# Altium PCB JGEJ_V1.3.PcbDoc
Units mm, origin at the board's own origin, x right, y up, seen from the top; angles counter-clockwise.
Board outline 7.72 x 47.12 mm, 4 copper layers (Top, INNER LAYER2, INNER LAYER3, Bottom), stack 0.774 mm thick; 138 components, 82 nets, 365 pads, 38 vias.
Unrouted connection lines stored in the file: 233.
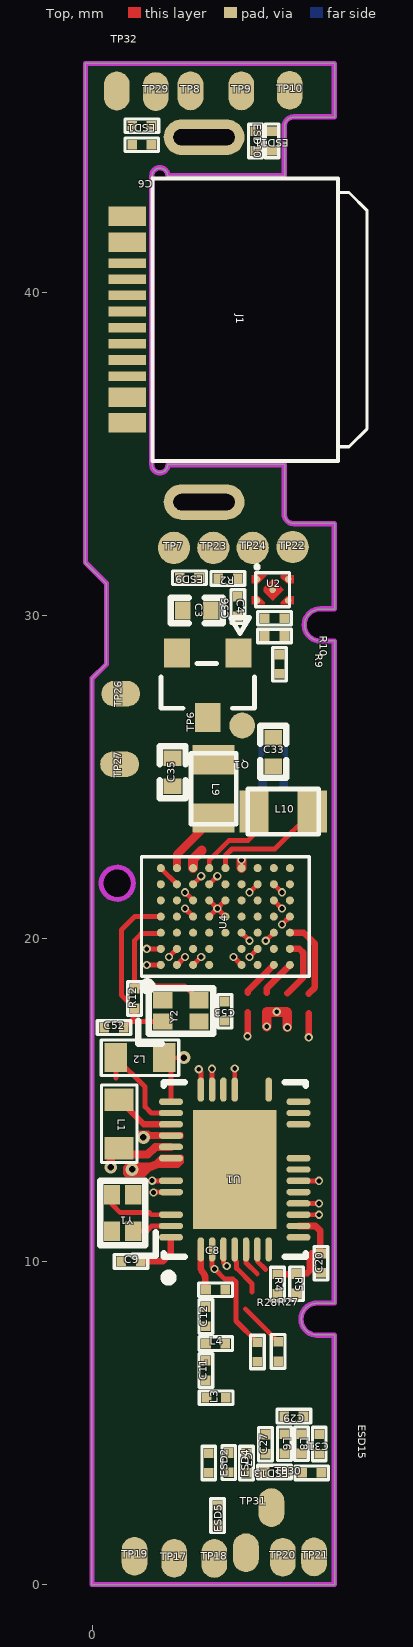
[diagram p0: Top view]
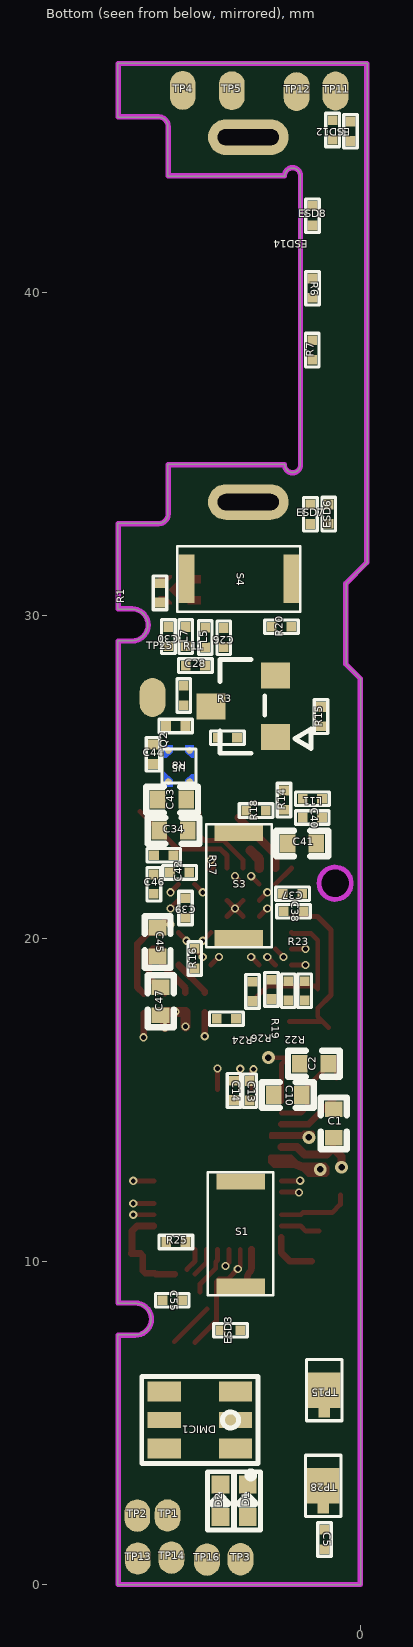
[diagram p1: Bottom view, seen from below]
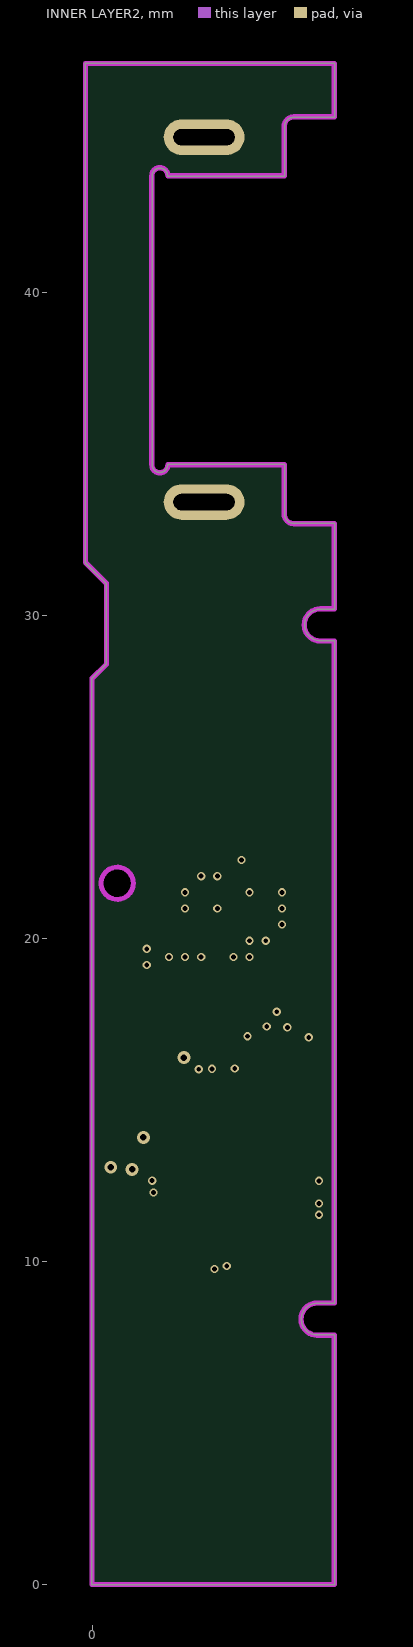
[diagram p2: INNER LAYER2]

## Layer stack, top to bottom
Solder Mask Top: solder mask 0.0102, Solder Resist, Dk 3.5
Top: signal copper 0.0343
Dielectric1: core 0.254, FR-4, Dk 4.2
INNER LAYER2: signal copper 0.0343
Dielectric2: prepreg 0.127, FR-4, Dk 4.2
INNER LAYER3: signal copper 0.036
Dielectric 3: core 0.254, Dk 4.2
Bottom: signal copper 0.0343
Solder Mask Bottom: solder mask 0.0102, Solder Resist, Dk 3.5

## Board outline
-0.011,0 ccw(c0,0) 0,-0.011 7.5,-0.011 ccw(c7.5,0) 7.511,0 7.511,7.715 cw(c7.5,7.715) 7.511,7.715 cw(c7.5,7.715) 7.511,7.715 ccw(c7.505,7.715) 7.511,7.715 ccw(c7.5,7.715) 7.5,7.726 6.97,7.726 ccw(c6.97,7.715) 6.97,7.726 cw(c6.97,7.72) 6.97,7.726 ccw(c6.97,7.72) 6.969,7.726 cw(c6.969,7.72) 6.969,7.726 cw(c6.969,7.72) 6.97,7.726 cw(c6.97,8.215) 6.97,7.726 ccw(c6.97,7.715) 6.969,7.726 ccw(c6.97,7.715) 6.969,7.726 cw(c6.97,8.215) 6.97,8.704 ccw(c6.97,8.715) 6.971,8.704 ccw(c6.97,8.715) 6.971,8.704 7.5,8.704 ccw(c7.5,8.715) 7.511,8.715 7.511,29.215 ccw(c7.5,29.215) 7.5,29.226 7.07,29.226 cw(c7.07,29.22) 7.07,29.226 cw(c7.07,29.715) 7.07,30.204 ccw(c7.07,30.21) 7.07,30.204 cw(c7.07,29.715) 7.07,30.204 7.5,30.204 ccw(c7.5,30.215) 7.511,30.215 7.511,32.85 ccw(c7.5,32.85) 7.5,32.861 6.269,32.861 ccw(c6.269,32.85) 6.259,32.855 ccw(c6.25,32.85) 6.25,32.861 cw(c6.25,33.15) 5.961,33.149 ccw(c5.95,33.15) 5.961,33.15 5.961,34.674 ccw(c5.95,34.675) 5.961,34.675 ccw(c5.95,34.675) 5.95,34.686 2.35,34.686 ccw(c2.35,34.68) 2.349,34.686 cw(c2.35,34.675) 2.35,34.686 cw(c2.35,34.68) 2.35,34.686 ccw(c2.35,34.675) 2.35,34.686 cw(c2.35,34.675) 2.35,34.686 cw(c2.35,34.675) 2.35,34.686 2.349,34.686 ccw(c2.35,34.675) 2.347,34.685 ccw(c2.35,34.675) 2.339,34.675 ccw(c2.35,34.675) 2.339,34.675 ccw(c2.35,34.675) 2.339,34.674 ccw(c2.1,34.675) 2.339,34.675 ccw(c2.1,34.675) 2.339,34.675 ccw(c2.1,34.675) 2.339,34.675 cw(c2.345,34.675) 2.339,34.675 cw(c2.345,34.675) 2.339,34.675 2.339,34.674 ccw(c2.35,34.675) 2.339,34.674 cw(c2.1,34.675) 1.861,34.675 ccw(c1.85,34.675) 1.861,34.675 1.861,43.625 ccw(c1.85,43.625) 1.861,43.625 cw(c2.1,43.625) 2.339,43.626 cw(c2.35,43.625) 2.339,43.626 ccw(c2.35,43.625) 2.35,43.614 5.95,43.614 ccw(c5.95,43.625) 5.961,43.625 5.961,45.15 ccw(c5.955,45.15) 5.961,45.15 cw(c6.25,45.15) 5.961,45.151 cw(c6.25,45.15) 6.25,45.439 cw(c6.25,45.15) 6.25,45.439 cw(c6.25,45.15) 6.25,45.439 7.5,45.439 ccw(c7.5,45.45) 7.511,45.45 7.511,47.1 ccw(c7.5,47.1) 7.5,47.111 -0.2,47.111 ccw(c-0.2,47.1) -0.211,47.1 -0.211,31.65 ccw(c-0.2,31.65) -0.208,31.642 0.439,30.996 0.439,28.504 -0.007,28.058 cw(c0,28.05) -0.007,28.058 ccw(c0,28.05) -0.007,28.058 ccw(c0,28.05) -0.008,28.058 ccw(c0,28.05) -0.011,28.05
cut-out: 0.28,21.715 ccw(c0.78,21.715) 0.78,21.215 ccw(c0.78,21.715) 1.28,21.715 ccw(c0.78,21.715) 0.78,22.215 ccw(c0.78,21.715)

## Design rules (kind name [scope] priority, off if disabled: settings)
Clearance [All] p1: gap=0.102
ComponentClearance "ComponentClearance - Default - DEFAULT" [All] p1 off: gap=0.152 collisioncheckmode=3 verticalgap=0.254 showdistances=FALSE
HoleSize [All] p1: absolutevalues=TRUE maxlimit=12.7 minlimit=0.025 maxpercent=80.000 minpercent=20.000
HoleToHoleClearance "HoleToHoleClearance - Default - DEFAULT" [All] p1: gap=0.152 allowstackedmicrovias=TRUE
Length "Default Length" [All] p1: maxlimit=1270 minlimit=0
MaxMinImpedance "Default Impedance" [All] p1: minimum=50.00 maximum=150.0
ParallelSegment "Default Parallel Segment Same Layer" [All] p1: limit=25.4 gap=5.08
ParallelSegment "Default Parallel Segment Adjasent" [All] p2: limit=25.4 gap=5.08
PlaneConnect "Default PlaneConnect" [All] p1: planeconnectstyle=Relief reliefexpansion=0.508 reliefentries=4 reliefconductorwidth=0.381 reliefairgap=0.254
PolygonConnect "PolygonConnect - Default SMT" [IsVIA] p1: connectstyle=Direct reliefconductorwidth=0.254 reliefentries=4 polygonreliefangle="90 Angle" airgapwidth=0.254
PolygonConnect "PolygonConnect - Default Pad" [All] p2: connectstyle=Relief reliefconductorwidth=0.381 reliefentries=4 polygonreliefangle="90 Angle" airgapwidth=0.254
RoutingLayers "RoutingLayers - Default - DEFAULT" [All] p1: top layer_v5=TRUE mid layer 1_v5=FALSE mid layer 2_v5=TRUE bottom layer_v5=TRUE
RoutingPriority "RoutingPriority - Default - DEFAULT" [All] p1: routingpriority=3
RoutingTopology "Default Routing Topology" [All] p1: topology=Shortest
RoutingVias "RoutingVias - Default - DEFAULT" [All] p1: holewidth=0.102 width=0.508 viastyle="Through Hole" minholewidth=0.102 minwidth=0.102 maxholewidth=2.54 maxwidth=2.54
SMDToCorner "SMDToCorner - Default - DEFAULT" [All] p1: distance=20000
SilkToSilkClearance [All] p1 off: silktosilkclearance=0.102
SilkToSolderMaskClearance [IsPad] p1: minsilkscreentomaskgap=0.102 clearancetoexposedcopper=TRUE
SolderMaskExpansion "SolderMaskExpansion from CAM settings" [All] p1: expansion=0.051
UnpouredPolygon [All] p1: allowunpoured=FALSE
Width "Default Width" [All] p1: maxlimit=1.524 minlimit=0.076 preferedwidth=0.152 toplayer_minwidth=0.102 midlayer1_minwidth=0.102 bottomlayer_minwidth=0.102 minimp=50.000000 maximp=50.000000 favimp=50.000000
20 further rules are at their usual default settings.

## Classes and differential pairs
component class "BT ": + C1 C2 C3 C4 C5 C8 C9 C10 C11 C12 C13 C14 C20 C26 C27 C28 C29 C30 C31 D1 D2 ESD3 ESD6 ESD7 ESD8 ESD9 GND J1 L1 L2 L3 L4 L5 L6 L7 L8 R2 R4 R5 R6 R7 R8 R25 S1 TP1 TP2 TP3 TP4 TP5 TP15 TP28 U1 U2 Y1
component class SNC8600A: C6 C7 C33 C34 C35 C36 C37 C38 C39 C40 C41 C42 C43 C44 C45 C46 C47 C52 C53 C55 DMIC1 ESD1 ESD2 ESD4 ESD5 ESD10 ESD11 ESD12 ESD13 ESD14 ESD15 L9 L10 L11 Q1 Q2 R1 R3 R9 R10 R11 R12 R14 R15 R16 R17 R18 R19 R20 R22 R23 R24 R26 R27 R28 S3 S4 TP6 TP7 TP8 TP9 TP10 TP11 TP12 TP13 TP14 TP16 TP17 TP18 TP19 TP20 TP21 TP22 TP23 TP24 TP25 TP26 TP27 TP29 TP30 TP31 TP32 U4 U5 Y2

## Components (designator, comment, footprint, x,y, rotation, side; value= is the part's Value field where it differs from the comment)
C1 "2.2uF/10V" C0402 0.823,14.28 r90 bottom
C2 "2.2uF/10V" C0402 1.44,16.126 r180 bottom
C3 "4.7uF/10V" C0402 3.243,30.162 r180 top
C4 "100nF/10V" 0201#1 4.516,30.284 r90 top
C5 "2.2pF/50V" 0201#1 1.108,1.394 r270 bottom
C6 "100nF/10V" 0201#1 1.542,44.587 r180 top
C7 "100nF/10V" 0201#1 3.617,3.762 r270 top
C8 "1pF" 0201#1 3.828,9.126 r0 top
C9 "1uF/10V" 0201#1 1.207,10.005 r0 top
C10 "2.2uF/10V" C0402 2.248,15.156 r180 bottom
C11 "0R" 0201#1 3.526,6.624 r270 top
C12 "10pF" 0201#1 3.526,8.293 r270 top
C13 "1uF/10V" 0201#1 3.426,15.288 r270 bottom
C14 "1uF/10V" 0201#1 3.912,15.301 r270 bottom
C20 "100nF/10V" 0201#1 7.092,9.949 r270 top
C26 "120pF/50V" 0201#1 4.232,29.319 r270 bottom
C27 "120pF/50V" 0201#1 5.37,4.344 r90 top
C28 "22pF/50V" 0201#1 5.108,28.456 r180 bottom
C29 "22pF/50V" 0201#1 6.251,5.212 r180 top
C30 "120pF/50V" 0201#1 5.944,29.353 r90 bottom
C31 "120pF/50V" 0201#1 7.038,4.349 r270 top
C33 "4.7uF/10V" C0402 5.616,25.786 r270 top
C34 "4.7uF/10V" C0402 5.781,23.345 r180 bottom
C35 "4.7uF/10V" C0402 2.494,25.153 r270 top
C36 "100nF/10V" 0201#1 5.651,29.924 r180 top
C37 "1uF/10V" 0201#1 2.098,21.392 r0 bottom
C38 "1uF/10V" 0201#1 2.07,20.851 r0 bottom
C39 "1uF/10V" 0201#1 5.415,20.95 r90 bottom
C40 "100nF/10V" 0201#1 1.487,23.75 r0 bottom
C41 "10uF/10V" C0402 1.8,22.946 r0 bottom
C42 "100nF/10V" 0201#1 5.595,22.052 r180 bottom
C43 "22uF/10V" C0402 5.827,24.305 r180 bottom
C44 "100nF/10V" 0201#1 6.421,25.71 r90 bottom
C45 "10uF/10V" C0402 6.279,19.896 r90 bottom
C46 "100nF/10V" 0201#1 6.393,21.687 r270 bottom
C47 "4.7uF/10V" C0402 6.185,18.059 r90 bottom
C52 "12pF/50V" 0201#1 0.681,17.244 r0 top
C53 "12pF/50V" 0201#1 4.115,17.752 r90 top
C55 "100nF/10V" 0201#1 5.824,8.801 r180 bottom
D1 "LED/RED/0402" LED0402 3.487,2.591 r90 bottom locked
D2 "LED/BLUE/0402" LED0402 4.331,2.591 r90 bottom locked
DMIC1 "SDM0502_RFS261_G02-TOP" 3526_TOP 4.969,5.093 r270 bottom locked
ESD1 "ESDAVLC8-1BU2" 0201#1 1.544,45.176 r0 top
ESD2 "ESDAVLC8-1BU2" 0201#1 4.237,3.772 r90 top
ESD3 "ESDAVLC8-1BU2" 0201#1 4.021,7.869 r0 bottom
ESD4 "ESDAVLC8-1BU2" 0201#1 4.785,3.757 r90 top
ESD5 "ESDAVLC8-1BU2" 0201#1 3.887,2.134 r270 top
ESD6 "ESDAVLC8-1BU2" 0201#1 0.975,33.147 r90 bottom
ESD7 "ESDAVLC8-1BU2" 0201#1 1.547,33.142 r90 bottom
ESD8 "ESDAVLC8-1BU2" 0201#1 1.483,42.388 r90 bottom
ESD9 "ESDAVLC8-1BU2" 0201#1 3.015,31.178 r180 top
ESD10 "ESDAVLC8-1BU2" 0201#1 5.06,44.701 r270 top
ESD11 "ESDAVLC8-1BU2" 0201#1 5.575,44.707 r270 top
ESD12 "ESDAVLC8-1BU2" 0201#1 0.859,45.042 r270 bottom
ESD13 "ESDAVLC8-1BU2" 0201#1 5.651,3.48 r180 top
ESD14 "ESDAVLC8-1BU2" 0201#1 0.305,45.004 r270 bottom
ESD15 "ESDAVLC8-1BU2" 0201#1 6.807,3.454 r0 top
J1 "TYPEC" "USB-TYPEC - 12" 1.245,39.171 r90 top
L1 "4.7uH" R0603 0.841,14.264 r90 top
L2 "4.7uH" R0603 1.488,16.312 r0 top
L3 "NC(2.7nH)" 0201#1 3.843,5.779 r0 top
L4 "NC(2.7nH)" 0201#1 3.83,7.457 r0 top
L5 "BLM03HD102SN1D" 0201#1 4.8,29.327 r90 bottom
L6 "BLM03HD102SN1D" 0201#1 5.956,4.354 r270 top
L7 "BLM03HD102SN1D" 0201#1 5.41,29.352 r90 bottom
L8 "BLM03HD102SN1D" 0201#1 6.49,4.354 r270 top
L9 "LQM21PN3R3NG0" L0805 3.764,24.641 r90 top
L10 "LQM21PN3R3NG0" L0805 5.921,23.934 r0 top
L11 "0R" 0201#2 1.686,24.31 r0 bottom
Q1 "SJ2301" SOT23_3407 3.581,27.849 r180 top
Q2 "MMBT3904" SOT23 3.63,27.193 r90 bottom
R1 "0R/5%" 0201#1 6.205,30.709 r90 bottom
R2 "100R/5%" 0201#1 4.209,31.156 r0 top
R3 "10K/5%" 0201#1 4.117,26.22 r180 bottom
R4 "0R/5%" 0201#1 5.74,9.304 r90 top
R5 "0R/5%" 0201#1 6.332,9.312 r90 top
R6 "5.1K/5%" 0201#1 1.483,40.145 r270 bottom
R7 "5.1K/5%" 0201#1 1.488,38.227 r90 bottom
R8 "0R/5%" 0201#1 5.716,26.586 r0 bottom
R9 "10K/5%" 0201#1 5.806,28.499 r270 top
R10 "100K/5%" 0201#1 5.649,29.373 r0 top
R11 "10K/5%" 0201#1 5.466,27.531 r90 bottom
R12 "1M/5%" 0201#1 1.318,18.146 r270 top
R14 "10K/1%" 0201#1 2.362,24.29 r90 bottom
R15 "270R/1%" 0201#1 1.217,26.876 r270 bottom
R16 "0R" 0201#1 5.13,19.384 r270 bottom
R17 "0R/5%" 0201#1 6.088,22.583 r180 bottom
R18 "1.1K/1%" 0201#1 3.228,23.965 r180 bottom
R19 "0R/5%" 0201#1 4.148,17.518 r180 bottom
R20 "0R" 0201#1 2.441,29.66 r0 bottom
R22 "33R/5%" 0201#1 1.725,18.385 r270 bottom
R23 "33R/5%" 0201#1 2.235,18.385 r90 bottom
R24 "33R/5%" 0201#1 3.34,18.367 r270 bottom
R25 "NC(0R/5%)" 0201#1 5.712,10.607 r180 bottom
R26 "33R/5%" 0201#1 2.753,18.428 r270 bottom
R27 "33R/5%" 0201#1 5.763,7.216 r90 top
R28 "33R/5%" 0201#1 5.121,7.198 r90 top
S1 "SKQGABE010" TD-302060 3.708,10.857 r270 bottom
S3 "SKQGABE010" TD-302060 3.759,21.641 r90 bottom
S4 "SKQGABE010" TD-302060 3.759,31.14 r180 bottom
TP1 "TP1" TP1-1MM#1 5.969,2.136 r90 bottom
TP2 "TP1" TP1-1MM#1 6.906,2.131 r90 bottom
TP3 "TP1" TP1-1MM#1 3.711,0.78 r90 bottom
TP4 "TP1" TP1-1MM#2 5.499,46.269 r90 bottom
TP5 "TP1" TP1-1MM#2 3.98,46.261 r90 bottom
TP6 "TP1" TP1-1MM#3 4.651,26.601 r180 top
TP7 "TP1" TP1-1MM#4 2.535,32.103 r90 top
TP8 "TP" TP1-1MM#2 3.048,46.253 r90 top
TP9 "TP" TP1-1MM#2 4.623,46.253 r90 top
TP10 "TP" TP1-1MM#2 6.121,46.274 r90 top
TP11 "TP" TP1-1MM#2 0.767,46.251 r90 bottom
TP12 "TP" TP1-1MM#2 1.974,46.233 r90 bottom (schematic designator TP7)
TP13 "TP1" TP1-1MM#1 6.891,0.803 r90 bottom
TP14 "TP1" TP1-1MM#1 5.85,0.831 r90 bottom
TP15 "TP" PAD 1.12,6.02 r270 bottom
TP16 "TP1" TP1-1MM#1 4.747,0.767 r90 bottom
TP17 "TP" TP1-1MM#2 2.545,0.81 r90 top
TP18 "TP" TP1-1MM#2 3.787,0.805 r90 top
TP19 "TP" TP1-1MM#2 1.318,0.874 r90 top
TP20 "TP" TP1-1MM#2 5.908,0.843 r90 top
TP21 "TP" TP1-1MM#2 6.878,0.851 r90 top
TP22 "TP1" TP1-1MM#4 6.213,32.128 r90 top
TP23 "TP1" TP1-1MM#4 3.755,32.103 r90 top
TP24 "TP1" TP1-1MM#4 4.975,32.103 r90 top
TP25 "TP1" TP1-1MM#2 6.434,27.468 r90 bottom
TP26 "TP" TP1-1MM#2 0.889,27.584 r180 top
TP27 "TP" TP1-1MM#2 0.853,25.4 r180 top
TP28 "TP" PAD 1.146,3.053 r270 bottom
TP29 "TP" TP1-1MM#2 1.974,46.233 r90 top (schematic designator TP19)
TP30 "TP" TP1-1MM#2 5.554,2.381 r90 top
TP31 "TP" TP1-1MM#2 4.765,0.983 r90 top
TP32 "TP" TP1-1MM#2 0.767,46.251 r90 top
U1 "BK32883" QFN40_4X5 4.42,12.85 r90 top
U2 "XB6042IS" UTDFN-1X1-4 5.593,30.803 r180 top
U4 "SNC8600A" BGA63C50P9X7_500X350X100 4.13,20.684 r0 top
U5 "SGM2033-3.3XUDH4G/TR" UTDFN-1X1-4AL 5.616,25.346 r270 bottom
Y1 "TSX-1612-26M" SF1612 0.948,11.502 r90 top
Y2 "SF1612" SF1612 2.752,17.76 r0 top

## Footprints (in the part's own frame and the unit in brackets; to place one, negate y for a bottom-side part, rotate by r counter-clockwise, add the part's x,y. Pads: shape width x height; smd on the part's side, far side on the other; paste and mask are expansions set on the pad)
0201#1 [mm]
  rect 0.3x0.3 smd: 1(-0.3,0) 2(0.3,0)
  silkscreen extent -0.52,-0.21 0.52,0.21, body extent -0.3,-0.15 0.3,0.15, height 0.3
0201#2 [mm]
  rect 0.3x0.3 smd: 1(-0.5,-0.02) 2(0.1,-0.02)
  silkscreen extent -0.72,-0.23 0.32,0.19, body extent -0.5,-0.17 0.1,0.13, height 0.3
3526_TOP [mm]
  rect 0.622x1.032 smd: 1(0.884,1.104) 3(-0.884,1.104) 4(-0.884,-1.104) 6(0.884,-1.104)
  rect 0.5x1.032 smd: 2(0,1.104) 5(0,-1.104)
  silkscreen extent -1.35,-1.8 1.77,1.8, body extent -1.4,-1.78 1.4,1.78, height 0.96
BGA63C50P9X7_500X350X100 [mm] "BGA, 63-Leads, Body 5.00x3.50mmx1.00mm, Pitch 0.50mm"
  round 0.25 smd: A1(-2,-1.5) A2(-1.5,-1.5) A3(-1,-1.5) A4(-0.5,-1.5) A6(0.5,-1.5) A7(1,-1.5) A8(1.5,-1.5) A9(2,-1.5) B1(-2,-1) B2(-1.5,-1) B3(-1,-1) B4(-0.5,-1) B6(0.5,-1) B7(1,-1) B8(1.5,-1) B9(2,-1) C1(-2,-0.5) C2(-1.5,-0.5) C3(-1,-0.5) C4(-0.5,-0.5) C5(0,-0.5) C6(0.5,-0.5) C7(1,-0.5) C8(1.5,-0.5) C9(2,-0.5) D1(-2,0) D2(-1.5,0) D3(-1,0) D4(-0.5,0) D5(0,0) D6(0.5,0) D7(1,0) D8(1.5,0) D9(2,0) E1(-2,0.5) E2(-1.5,0.5) E3(-1,0.5) E4(-0.5,0.5) E5(0,0.5) E6(0.5,0.5) E7(1,0.5) E8(1.5,0.5) E9(2,0.5) F1(-2,1) F2(-1.5,1) F3(-1,1) F4(-0.5,1) F5(0,1) F6(0.5,1) F7(1,1) F8(1.5,1) F9(2,1) G1(-2,1.5) G2(-1.5,1.5) G3(-1,1.5) G4(-0.5,1.5) G5(0,1.5) G6(0.5,1.5) G7(1,1.5) G8(1.5,1.5) G9(2,1.5)
  silkscreen extent -2.6,-2.28 2.6,1.85, body extent -2.5,-1.75 2.5,1.75, height 1
C0402 [mm]
  rect 0.48x0.55 smd: 1(-0.44,0) 2(0.44,0)
  silkscreen extent -0.8,-0.4 0.8,0.4, body extent -0.76,-0.38 0.76,0.38, height 0.6
L0805 [mm]
  rect 0.9x1.3 smd: 1(-0.9,0) 2(0.9,0)
  silkscreen extent -1.1,-0.7 1.1,0.7, body extent -1,-0.63 1,0.62, height 0.78
LED0402 [mm]
  rrect0% 0.55x0.55 smd: 1(0.5,0) 2(-0.5,0)
  silkscreen extent -0.9,-0.4 0.9,0.4, body extent -0.89,-0.38 0.89,0.38, height 0.6
PAD [mm]
  rect 1.1x1 smd: 1(0,0)
  rect 1.2x0.35 smd: 1(0.254,0)
  silkscreen extent -0.95,-0.55 0.95,0.55, body extent -0.89,-0.51 0.89,0.51, height 1.7
QFN40_4X5 [mm] "QFN, 40-Leads, Body 5.00x4.00mm, Pitch 0.35mm, Thermal Pad 3.70x2.80mm, IPC Medium Density"
  oval 0.75x0.2 smd: 1(-2.475,1.05) 2(-2.475,0.7) 3(-2.475,0.35) 4(-2.475,0) 5(-2.475,-0.35) 6(-2.475,-0.7) 7(-2.475,-1.05) 21(2.475,-1.05) 24(2.475,0) 25(2.475,0.35) 26(2.475,0.7) 27(2.475,1.05)
  oval 0.2x0.75 smd: 8(-2.1,-1.975) 9(-1.75,-1.975) 10(-1.4,-1.975) 11(-1.05,-1.975) 12(-0.7,-1.975) 13(-0.35,-1.975) 14(0,-1.975) 15(0.35,-1.975) 18(1.4,-1.975) 19(1.75,-1.975) 20(2.1,-1.975) 28(2.1,1.975) 29(1.75,1.975) 30(1.4,1.975) 31(1.05,1.975) 32(0.7,1.975) 33(0.35,1.975) 35(-0.35,1.975) 36(-0.7,1.975) 38(-1.4,1.975) 39(-1.75,1.975) 40(-2.1,1.975)
  rect 3.7x2.6 smd: 41(0,0)
  silkscreen extent -3.47,-2.2 2.7,2.2, body extent -2.55,-2.05 2.55,2.05, height 0.8
R0603 [mm]
  rect 0.7x0.9 smd: 1(-0.75,0) 2(0.75,0)
  silkscreen extent -1.2,-0.55 1.2,0.55, body extent -0.85,-0.48 0.85,0.47, height 0.9
SF1612 [mm]
  rect 0.6x0.5 smd: 1(-0.56,-0.33) 2(0.56,-0.33) 3(0.56,0.33) 4(-0.56,0.33)
  silkscreen extent -1.32,-1.02 1,0.7, body extent -1.02,-0.64 1.02,0.64, height 0.6
SOT23 [mm]
  rect 0.8x0.9 smd: 1(-0.953,-1) 2(0.953,-1) 3(0,1)
  silkscreen extent -1.45,-2.1 1.45,0.72
SOT23_3407 [mm]
  rect 0.8x0.9 smd: 1(-0.952,-1) 2(0.953,-1) 3(0,1)
  silkscreen extent -1.45,-2.1 1.45,0.72
TD-302060 [mm]
  rect 0.5x1.5 smd: 1(-1.625,0) 2(1.625,0)
  silkscreen extent -1.91,-1.02 1.91,1.02, body extent -1.75,-1 1.75,1, height 0.6
TP1-1MM#1 [mm]
  oval 1x0.8 smd: 1(0,0)
TP1-1MM#2 [mm]
  oval 1.2x0.8 smd: 1(0,0)
TP1-1MM#3 [mm]
  round 0.8 smd: 1(0,0)
TP1-1MM#4 [mm]
  round 1 smd: 1(0,0)
"USB-TYPEC - 12" [mm]
  rect 0.6x1.174 smd: A1(-3.2,0.152) A9(2.4,0.152) B1(3.2,0.152) B9(-2.4,0.152)
  rect 0.3x1.174 smd: A4(-1.75,0.152) A5(-1.25,0.152) A6(-0.25,0.152) A7(0.75,0.152) B4(1.75,0.152) B5(1.25,0.152) B6(0.25,0.152) B7(-0.75,0.152)
  oval 1.1x2.5 hole 0.5 slot 1.9 at 90 deg: G1(-5.65,-2.225) G2(5.65,-2.225)
  silkscreen extent -4.37,-7.28 4.38,-0.62
UTDFN-1X1-4 [mm]
  round 0.2 smd mask+0: 1(0.483,-0.33) 2(0.483,0.33) 3(-0.483,0.33) 4(-0.483,-0.33) 5(0,0)
  Top region: 0,-0.339 -0.339,0 0,0.339 0.279,0.06 0.279,-0.06
  Top region: -0.25,-0.45 -0.65,-0.45 -0.65,-0.2 -0.43,-0.2 -0.25,-0.38
  Top region: -0.25,0.38 -0.43,0.2 -0.65,0.2 -0.65,0.45 -0.25,0.45
  Top region: 0.65,-0.45 0.18,-0.45 0.43,-0.2 0.65,-0.2
  Top region: 0.65,0.2 0.43,0.2 0.25,0.38 0.25,0.45 0.65,0.45
  silkscreen extent -0.53,-0.76 0.53,0.53, body extent -0.57,-0.53 0.57,0.52, height 0.59
UTDFN-1X1-4AL [mm]
  round 0.2 smd mask+0: 1(0.483,-0.33) 2(0.483,0.33) 3(-0.483,0.33) 4(-0.483,-0.33)
  Top region: -0.25,-0.45 -0.65,-0.45 -0.65,-0.2 -0.43,-0.2 -0.25,-0.38
  Top region: -0.25,0.38 -0.43,0.2 -0.65,0.2 -0.65,0.45 -0.25,0.45
  Top region: 0.65,-0.45 0.18,-0.45 0.43,-0.2 0.65,-0.2
  Top region: 0.65,0.2 0.43,0.2 0.25,0.38 0.25,0.45 0.65,0.45
  silkscreen extent -0.53,-0.53 0.53,0.53, body extent -0.57,-0.52 0.57,0.53, height 0.59

## Part data
C1 C2 C3 C4 C5 C6 C7 C8 C9 C10 C11 C12 C13 C14 C20 C26 C27 C28 C29 C30 C31 C33 C34 C35 C37 C38 C39 C40 C41 C42 C43 C44 C45 C46 C47 C52 C53 C55: library part "Cap Semi", "Capacitor (Semiconductor SIM Model)"
C36: library part CAP, "Capacitor"
D1 D2: library part LED0603
DMIC1: library part 3526-TOP
ESD1 ESD2 ESD3 ESD4 ESD5 ESD6 ESD7 ESD8 ESD9 ESD10 ESD11 ESD12 ESD13 ESD14 ESD15: library part ESD
L1 L2 L3 L4 L5 L6 L7 L8 L9 L10 L11: library part Inductor, "Inductor"
Q1: library part MOSFET-P, "P-Channel MOSFET"
Q2: library part 2N3904, "NPN General Purpose Amplifier"
R1 R2 R3 R4 R5 R6 R7 R8 R9 R10 R11 R12 R14 R15 R16 R17 R18 R19 R20 R22 R23 R24 R25 R26 R27 R28: library part Res2, "Resistor"
S1 S3 S4: library part SW-PB, "Switch"
U1: library part BK3288_QFN40_4X5
U5: library part SGM2033
Y1: library part SF1612

## Via types
v1: diameter 0.254, hole 0.152, Top to Bottom, tented both sides, 34 vias
v2: diameter 0.4, hole 0.2, Top to Bottom, tented both sides, 4 vias

## Nets (pads, with @x,y where several pads share a name; then routed paths per layer and width w, separated by ;. In a path a pad name is that pad's centre, name@x,y a point inside that pad or via, vN(x,y) a via of type N, cw(c..) or ccw(c..) an arc to the next point about the centre after c; other vN are vias at no path point)
ADC0_KEY: R14.1 R15.2 R18.2 R20.2 U4.B1 | length 0.4
  Top w0.152: v1(1.696,19.684) U4.B1
AGND: C26.1 C27.1 C30.2 C31.2 C34.1 C45.1 C46.1 C47.1 R1.1 R17.1 R19.1 U4.C7 U4.D6 U4.E7 | length 1.5
  Top w0.3: v1(5.41,17.28) 5.415,17.285 5.415,17.726 6.035,17.726 6.05,17.711 6.05,17.257 v1(6.048,17.254)
  other v1: 5.72,17.734
AOHPLN: C28.1 C30.1 L7.1 U4.F9
AOHPLP: C26.2 C28.2 L5.1 U4.E9
AOHPRN: C29.1 C31.1 L8.1 U4.G9
AOHPRP: C27.2 C29.2 L6.1 U4.G8
BAT+: C3.1 C10.2 C36.2 ESD9.1 Q1.2 R2.1 R10.1 TP4.1 U1.31
  other v2: 1.593,13.846
BAT-: C4.1 TP5.1 U2.2 U2.3 U2.5
BK_CLK: R22.2 U1.13 | length 0.6
  Top w0.152: U1.13 v1(7.031,12.5)
BK_RXD: R27.2 U1.3 | length 2
  Top w0.152: U1.3 4.07,9.961 v1(4.173,9.858) ; 4.745,8.535 R27.2
BK_SDI: R24.2 U1.5 | length 0.9
  Top w0.152: U1.5 4.77,9.965 5.116,9.619
BK_SDO: R26.2 U1.6 | length 0.7
  Top w0.152: U1.6 5.12,10.009 5.372,9.756
BK_TXD: R28.2 U1.2 | length 3.6
  Top w0.152: U1.2 3.72,9.844 v1(3.795,9.769) 4.11,9.454 4.374,9.454 4.46,9.368 4.46,8.159 R28.2
BK_WS: R23.2 U1.4 | length 1.5
  Top w0.152: U1.4 4.42,10.042 4.478,9.984 4.478,9.787 4.961,9.304 4.961,9.063
DFU_N: R25.1 TP16.1 U4.E8 | length 0.4
  Top w0.152: U4.E8 v1(5.88,20.934)
DM: ESD7.1 J1.A7 J1.B6 U4.F1
DMIC_CLK2: DMIC1.2 TP23.1 U4.A6 | length 0.4
  Top w0.152: v1(4.38,19.434) U4.A6
DMIC_CLK3: ESD5.1 ESD11.1 TP9.1 TP18.1
DMIC_DAT2: DMIC1.3 TP24.1 U4.B7 | length 0.4
  Top w0.152: v1(4.88,19.434) U4.B7
DMIC_DAT3: ESD4.1 ESD10.1 TP8.1 TP17.1 U4.B6
DP: ESD6.1 J1.A6 J1.B7 U4.E1
GND: C1.2 C2.2 C3.2 C5.2 C6.1 C7.1 C8.2 C9.1 C13.2 C14.2 C20.2 C33.1 C35.1 C37.1 C38.1 C39.1 C40.1 C41.1 C42.1 C43.1 C44.1 C52.1 C53.1 C55.1 DMIC1.4 DMIC1.5 DMIC1.6 ESD1.2 ESD2.2 ESD3.2 ESD4.2 ESD5.2 ESD6.2 ESD7.2 ESD8.2 ESD9.2 ESD10.2 ESD11.2 ESD12.2 ESD13.2 ESD14.2 ESD15.2 J1.A1 J1.B1 J1.G1 J1.G2 L3.2 L4.2 Q2.2 R1.2 R6.2 R7.2 R11.2 R16.2 R17.2 R19.2 S1.1 S3.1 S4.1 TP3.1 TP7.1 TP10.1 TP19.1 TP27.1 TP30.1 TP32.1 U1.12 U2.4 U4.C3 U4.C4 U4.C5 U4.D4 U4.D5 U4.E4 U4.E5 U4.E6 U5.2 Y1.2 Y1.4 Y2.2 Y2.4 | length 1.4
  Top w0.152: U4.D4 v1(3.88,20.934) ; U4.E4 v1(3.88,20.934) ; U4.D5 v1(3.88,20.934) ; U4.E5 v1(3.88,20.934)
LED1: D1.1 U1.7
LED2: D2.1 U1.8
LSPK+: ESD12.1 L5.2 TP11.1
LSPK-: ESD14.1 L7.2 TP12.1
NetC4_2: C4.2 R2.2 U2.1
NetC5_1: C5.1 TP28.1
NetC11_1: C11.1 C12.2 L4.1
NetC11_2: C11.2 L3.1 TP15.1
NetC33_2: C33.2 L10.2 U4.G5 | length 3.6
  Top w0.152: U4.G5 4.13,22.573 4.333,22.776 5.663,22.776 L10.2
NetC36_1: C36.1 Q1.1 R9.1
NetC39_2: C39.2 U4.G7
NetC45_2: C45.2 C46.2 U4.D9 | length 0.4
  Top w0.152: v1(5.88,20.434) U4.D9
NetC47_2: C47.2 U4.D7
NetC52_2: C52.2 R12.2 U4.D1 Y2.1 | length 5.8
  Top w0.152: C52.2 1.167,17.43 ; U4.D1 1.326,20.684 0.909,20.267 0.909,18.255 R12.2 1.318,17.582 1.167,17.43 ; Y2.1 1.167,17.43
NetC53_2: C53.2 R12.1 U4.C1 Y2.3 | length 4.6
  Top w0.152: U4.C1 2.098,20.152 1.521,20.152 1.318,19.949 R12.1 1.409,18.537 2.865,18.537 Y2.3
NetD1_2: D1.2 R4.1
NetD2_2: D2.2 R5.1
NetJ1_A5: J1.A5 R7.1
NetJ1_B5: J1.B5 R6.1
NetL9_1: L9.1 U4.G2 | length 2
  Top w0.254: U4.G2 2.63,22.606 L9.1
NetL10_1: L10.1 U4.G4 | length 2.7
  Top w0.152: U4.G4 3.63,22.432 4.233,23.035 4.826,23.035 4.994,23.203 4.994,23.907 L10.1
NetQ2_1: Q2.1 R3.2
NetQ2_3: Q2.3 R9.2 R10.2
NetR8_2: R8.2 U1.24 | length 0.6
  Top w0.152: U1.24 v1(4.42,15.974)
NetR15_1: R15.1 TP26.1
NetR16_1: R16.1 U4.C6 | length 0.4
  Top w0.152: U4.C6 v1(4.88,19.934)
NetR18_1: R18.1 S3.2
NetR20_1: R20.1 S4.2
NetR25_2: R25.2 U1.35 | length 0.6
  Top w0.152: v1(1.862,12.504) 1.866,12.5 U1.35
NetU1_38: U1.38 Y1.3 | length 2.3
  Top w0.152: Y1.3 0.618,11.77 0.874,11.514 1.775,11.514 1.839,11.45 U1.38
NetU1_39: U1.39 Y1.1 | length 1.2
  Top w0.152: Y1.1 1.687,10.942 1.844,11.1 U1.39
P0/TXD/DM: TP1.1 U1.10 | length 0.6
  Top w0.152: U1.10 v1(7.031,11.45)
P1/RXD/DP: TP2.1 U1.11 | length 0.6
  Top w0.152: U1.11 v1(7.031,11.8)
P12/I2S3_CLK: R22.1 U4.B2 | length 0.4
  Top w0.152: v1(2.38,19.434) U4.B2
P13/I2S3_WS: R23.1 U4.A1 | length 0.4
  Top w0.152: v1(1.696,19.184) U4.A1
P14/I2S3_SDI: R26.1 U4.A2 | length 0.4
  Top w0.152: U4.A2 v1(2.88,19.434)
P15/I2S3_SDO: R24.1 U4.A3 | length 0.4
  Top w0.152: U4.A3 v1(3.38,19.434)
P15/POWER: ESD3.1 S1.2 U1.36 | length 0.6
  Top w0.152: v1(1.9,12.136) 1.914,12.15 U1.36
POWER_IN: L11.1 Q1.3 TP6.1
PWR_CTR: R3.1 R8.1 R11.1 TP25.1
RF: C8.1 C12.1 U1.1 | length 1.3
  Top w0.203: U1.1 3.37,9.808 ccw(c3.572,9.808) 3.429,9.665 cw(c3.252,9.488) 3.502,9.488 C8.1@3.502,9.126
RSPK+: ESD13.1 L6.2 TP20.1
RSPK-: ESD15.1 L8.2 TP21.1
SNC_IN: C40.2 C41.2 C44.2 L11.2 U4.G3 U4.G6 U5.4 | length 0.9
  Top w0.305: U4.G3 3.13,22.459 3.399,22.728 ; v1@4.628,22.438 v1(4.63,22.437) U4.G6
SWA: L1.2 U1.30 | length 1.9
  Top w0.203: L1.2 1.605,14.25 U1.30
SWD: L2.1 U1.29 | length 3.4
  Top w0.152: 0.742,15.684 0.738,15.688 L2.1 1.643,15.407 1.643,14.79 1.834,14.6 U1.29
UART_RXD: R28.1 TP14.1 U4.F3 | length 0.4
  Top w0.152: U4.F3 v1(3.38,21.934)
UART_TXD: R27.1 TP13.1 U4.F4 | length 0.4
  Top w0.152: U4.F4 v1(3.88,21.934)
VBUS: ESD8.1 J1.A4 J1.A9 J1.B4 J1.B9 U1.33
  other v2: 1.242,12.852
VCC3SYS: C10.1 C14.1 U1.26 | length 0.6
  Top w0.152: v1(3.719,15.969) 3.72,15.968 U1.26
VDD: 
VDD3VFLA: C20.1 R4.2 R5.2 U1.9 | length 3.3
  Top w0.203: R4.2 5.748,9.612 R5.2 6.362,9.642 6.662,9.642 6.736,9.716 6.736,10.18 6.805,10.249 C20.1 7.071,10.27 7.071,10.945 6.916,11.1 U1.9
VDD12: C2.1 L2.2 U1.28 | length 2.1
  Top w0.152: U1.28 2.445,16.106 L2.2 2.842,16.312 v2(2.845,16.314)
VDD15: C9.2 U1.40 | length 1.5
  Top w0.203: C9.2 2.182,10.005 2.445,10.268 U1.40
VDD18: C1.1 L1.1 U1.32 | length 2.5
  Top w0.254: v2(0.579,12.918) 0.579,13.252 L1.1 1.04,13.315 1.725,13.315 1.96,13.55 U1.32
VDD_3V3: C34.2 C42.2 C43.2 U4.F8 U5.1 | length 0.4
  Top w0.152: U4.F8 v1(5.88,21.434)
VDD_CORE11: C35.2 L9.2 U4.F2 U4.F7 U4.G1 | length 1.1
  Top w0.152: U4.G1 U4.F2 ; v1(4.88,21.434) U4.F7
VDD_IO33: C37.2 U4.E3 U5.3 | length 0.4
  Top w0.152: v1(2.88,21.434) U4.E3
VDD_IP33: C6.2 C7.2 C38.2 C55.2 DMIC1.1 ESD1.1 ESD2.1 R14.2 TP22.1 TP29.1 TP31.1 U4.D3 | length 0.4
  Top w0.152: v1(2.88,20.934) U4.D3
VDDDIG: C13.1 U1.27 | length 0.7
  Top w0.152: v1(3.305,15.954) 3.37,15.889 U1.27
pads on no net: U1.14 U1.15 U1.18 U1.19 U1.20 U1.21 U1.25 U1.41 U4.A4 U4.A7 U4.A8 U4.A9 U4.B3 U4.B4 U4.B8 U4.B9 U4.C2 U4.C8 U4.C9 U4.D2 U4.D8 U4.E2 U4.F5 U4.F6
copper on no net: | length 8.7
  Top w0.152: v1(5.38,19.934) 5.63,20.184
  Top w0.203: 4.816,17.726 4.816,16.98 v1(4.818,16.977) ; 4.816,18.326 4.816,18.37 5.63,19.184 ; 5.415,18.326 5.415,18.469 6.13,19.184 ; 6.05,18.311 6.546,18.806 6.546,19.558 6.42,19.684 6.13,19.684 ; 6.13,20.184 6.555,20.184 6.904,19.835 6.904,18.489 6.708,18.293 ; v1@6.708,16.947 6.708,17.693
  other v1: 6.711,16.944

## Keep-outs
Keep-Out Layer:
  circle w0.152: c0.78,21.715 r0.5
  lines w0.152: 6.25,32.85 cw(c6.25,33.15) 5.95,33.15 5.95,34.675 2.35,34.675 cw(c2.1,34.675) 1.85,34.675 1.85,43.625 cw(c2.1,43.625) 2.35,43.625 5.95,43.625 5.95,45.15 cw(c6.25,45.15) 6.25,45.45 7.5,45.45 7.5,47.1 -0.2,47.1 -0.2,31.65 0.45,31 0.45,28.5 0,28.05 0,0 ; 6.269,32.85 7.5,32.85 7.5,30.215 7.07,30.215 ccw(c7.07,29.715) 7.07,29.215 ; -0.205,31.65 ccw(c-0.2,31.65) -0.204,31.646 ; -0.205,31.65 ccw(c-0.2,31.65) -0.204,31.646 ; -0.205,31.65 ccw(c-0.2,31.65) -0.204,31.646 ; -0.205,31.65 -0.205,47.1 ; -0.205,31.65 -0.205,47.1 ; -0.205,31.65 -0.205,47.1 ; -0.205,47.1 cw(c-0.2,47.1) -0.2,47.105 ; -0.205,47.1 cw(c-0.2,47.1) -0.2,47.105 ; -0.205,47.1 cw(c-0.2,47.1) -0.2,47.105 ; -0.204,31.646 0.445,30.998 ; -0.204,31.646 0.445,30.998 ; -0.204,31.646 0.445,30.998 ; -0.2,47.105 7.5,47.105 ; -0.2,47.105 7.5,47.105 ; -0.2,47.105 7.5,47.105 ; -0.195,31.652 -0.195,47.095 ; -0.195,31.652 0.454,31.004 ; -0.195,31.652 -0.195,47.095 ; -0.195,31.652 0.454,31.004 ; -0.195,31.652 -0.195,47.095 ; -0.195,31.652 0.454,31.004 ; -0.195,47.095 7.495,47.095 ; -0.195,47.095 7.495,47.095 ; -0.195,47.095 7.495,47.095 ; -0.005,0 ccw(c0,0) 0,-0.005 ; -0.005,0 ccw(c0,0) 0,-0.005 ; -0.005,0 ccw(c0,0) 0,-0.005 ; -0.005,0 -0.005,28.05 ; -0.005,0 -0.005,28.05 ; -0.005,0 -0.005,28.05 ; -0.005,28.05 cw(c0,28.05) -0.003,28.054 ; -0.005,28.05 cw(c0,28.05) -0.003,28.054 ; -0.005,28.05 cw(c0,28.05) -0.003,28.054 ; -0.004,28.054 -0.003,28.054 ; -0.004,28.054 -0.003,28.054 ; -0.004,28.054 -0.003,28.054 ; -0.004,28.054 -0.003,28.054 ; -0.004,28.054 -0.003,28.054 ; -0.004,28.054 -0.003,28.054 ; -0.003,28.054 0.445,28.502 ; -0.003,28.054 0.445,28.502 ; -0.003,28.054 0.445,28.502 ; 0,-0.005 7.5,-0.005 ; 0,-0.005 7.5,-0.005 ; 0,-0.005 7.5,-0.005 ; 0,0 7.5,0 ; 0,0 7.5,0 ; 0.005,0.005 0.005,28.048 ; 0.005,0.005 7.495,0.005 ; 0.005,0.005 0.005,28.048 ; 0.005,0.005 7.495,0.005 ; 0.005,0.005 0.005,28.048 ; 0.005,0.005 7.495,0.005 ; 0.005,28.048 0.454,28.496 ; 0.005,28.048 0.454,28.496 ; 0.005,28.048 0.454,28.496 ; 0.445,28.502 0.445,30.998 ; 0.445,28.502 0.445,30.998 ; 0.445,28.502 0.445,30.998 ; 0.454,28.496 ccw(c0.45,28.5) 0.455,28.5 ; 0.454,28.496 ccw(c0.45,28.5) 0.455,28.5 ; 0.454,28.496 ccw(c0.45,28.5) 0.455,28.5 ; 0.454,31.004 cw(c0.45,31) 0.455,31 ; 0.454,31.004 cw(c0.45,31) 0.455,31 ; 0.454,31.004 cw(c0.45,31) 0.455,31 ; 0.455,28.5 0.455,31 ; 0.455,28.5 0.455,31 ; 0.455,28.5 0.455,31 ; 1.845,34.675 ccw(c2.1,34.675) 2.355,34.67 ; 1.845,34.675 ccw(c1.85,34.675) 1.845,34.675 ; 1.845,34.675 ccw(c2.1,34.675) 2.355,34.67 ; 1.845,34.675 ccw(c1.85,34.675) 1.845,34.675 ; 1.845,34.675 ccw(c2.1,34.675) 2.355,34.67 ; 1.845,34.675 ccw(c1.85,34.675) 1.845,34.675 ; 1.845,34.675 1.845,34.675 ; 1.845,34.675 1.845,34.675 ; 1.845,34.675 1.845,43.625 ; 1.845,34.675 1.845,34.675 ; 1.845,34.675 1.845,34.675 ; 1.845,34.675 1.845,43.625 ; 1.845,34.675 1.845,34.675 ; 1.845,34.675 1.845,34.675 ; 1.845,34.675 1.845,43.625 ; 1.845,43.625 ccw(c1.85,43.625) 1.845,43.625 ; 1.845,43.625 cw(c2.1,43.625) 2.355,43.63 ; 1.845,43.625 ccw(c1.85,43.625) 1.845,43.625 ; 1.845,43.625 cw(c2.1,43.625) 2.355,43.63 ; 1.845,43.625 ccw(c1.85,43.625) 1.845,43.625 ; 1.845,43.625 cw(c2.1,43.625) 2.355,43.63 ; 1.855,34.675 ccw(c1.85,34.675) 1.855,34.675 ; 1.855,34.675 ccw(c2.1,34.675) 2.345,34.675 ; 1.855,34.675 ccw(c1.85,34.675) 1.855,34.675 ; 1.855,34.675 ccw(c2.1,34.675) 2.345,34.675 ; 1.855,34.675 ccw(c1.85,34.675) 1.855,34.675 ; 1.855,34.675 ccw(c2.1,34.675) 2.345,34.675 ; 1.855,34.675 1.855,43.625 ; 1.855,34.675 1.855,43.625 ; 1.855,34.675 1.855,43.625 ; 1.855,43.625 cw(c2.1,43.625) 2.345,43.625 ; 1.855,43.625 ccw(c1.85,43.625) 1.855,43.625 ; 1.855,43.625 cw(c2.1,43.625) 2.345,43.625 ; 1.855,43.625 ccw(c1.85,43.625) 1.855,43.625 ; 1.855,43.625 cw(c2.1,43.625) 2.345,43.625 ; 1.855,43.625 ccw(c1.85,43.625) 1.855,43.625 ; 2.345,34.675 ccw(c2.1,34.675) 2.345,34.675 ; 2.345,34.675 cw(c2.35,34.675) 2.349,34.68 ; 2.345,34.675 ccw(c2.1,34.675) 2.345,34.675 ; 2.345,34.675 cw(c2.35,34.675) 2.349,34.68 ; 2.345,34.675 ccw(c2.1,34.675) 2.345,34.675 ; 2.345,34.675 cw(c2.35,34.675) 2.349,34.68 ; 2.345,34.675 2.345,34.675 ; 2.345,34.675 2.345,34.675 ; 2.345,34.675 2.345,34.675 ; 2.345,43.625 ccw(c2.35,43.625) 2.35,43.62 ; 2.345,43.625 ccw(c2.35,43.625) 2.35,43.62 ; 2.345,43.625 ccw(c2.35,43.625) 2.35,43.62 ; 2.349,34.68 cw(c2.35,34.675) 2.35,34.68 ; 2.349,34.68 cw(c2.35,34.675) 2.35,34.68 ; 2.349,34.68 cw(c2.35,34.675) 2.35,34.68 ; 2.35,34.68 ccw(c2.35,34.675) 2.35,34.68 ; 2.35,34.68 ccw(c2.35,34.675) 2.35,34.68 ; 2.35,34.68 ccw(c2.35,34.675) 2.35,34.68 ; 2.35,34.68 2.35,34.68 ; 2.35,34.68 5.95,34.68 ; 2.35,34.68 2.35,34.68 ; 2.35,34.68 5.95,34.68 ; 2.35,34.68 2.35,34.68 ; 2.35,34.68 5.95,34.68 ; 2.35,43.62 5.95,43.62 ; 2.35,43.62 5.95,43.62 ; 2.35,43.62 5.95,43.62 ; 2.355,34.67 5.945,34.67 ; 2.355,34.67 5.945,34.67 ; 2.355,34.67 5.945,34.67 ; 2.355,43.63 5.945,43.63 ; 2.355,43.63 5.945,43.63 ; 2.355,43.63 5.945,43.63 ; 5.945,33.15 ccw(c6.25,33.15) 6.25,32.845 ; 5.945,33.15 cw(c5.95,33.15) 5.945,33.15 ; 5.945,33.15 ccw(c6.25,33.15) 6.25,32.845 ; 5.945,33.15 cw(c5.95,33.15) 5.945,33.15 ; 5.945,33.15 ccw(c6.25,33.15) 6.25,32.845 ; 5.945,33.15 cw(c5.95,33.15) 5.945,33.15 ; 5.945,33.15 5.945,33.15 ; 5.945,33.15 5.945,33.15 ; 5.945,33.15 5.945,34.67 ; 5.945,33.15 5.945,33.15 ; 5.945,33.15 5.945,33.15 ; 5.945,33.15 5.945,34.67 ; 5.945,33.15 5.945,33.15 ; 5.945,33.15 5.945,33.15 ; 5.945,33.15 5.945,34.67 ; 5.945,43.63 5.945,45.15 ; 5.945,43.63 5.945,45.15 ; 5.945,43.63 5.945,45.15 ; 5.945,45.15 ccw(c5.95,45.15) 5.945,45.15 ; 5.945,45.15 cw(c6.25,45.15) 6.25,45.455 ; 5.945,45.15 ccw(c5.95,45.15) 5.945,45.15 ; 5.945,45.15 cw(c6.25,45.15) 6.25,45.455 ; 5.945,45.15 ccw(c5.95,45.15) 5.945,45.15 ; 5.945,45.15 cw(c6.25,45.15) 6.25,45.455 ; 5.95,34.68 cw(c5.95,34.675) 5.955,34.675 ; 5.95,34.68 cw(c5.95,34.675) 5.955,34.675 ; 5.95,34.68 cw(c5.95,34.675) 5.955,34.675 ; 5.95,43.62 ccw(c5.95,43.625) 5.955,43.625 ; 5.95,43.62 ccw(c5.95,43.625) 5.955,43.625 ; 5.95,43.62 ccw(c5.95,43.625) 5.955,43.625 ; 5.955,33.15 ccw(c5.95,33.15) 5.955,33.15 ; 5.955,33.15 ccw(c6.25,33.15) 6.25,32.855 ; 5.955,33.15 ccw(c5.95,33.15) 5.955,33.15 ; 5.955,33.15 ccw(c6.25,33.15) 6.25,32.855 ; 5.955,33.15 ccw(c5.95,33.15) 5.955,33.15 ; 5.955,33.15 ccw(c6.25,33.15) 6.25,32.855 ; 5.955,33.15 5.955,34.674 ; 5.955,33.15 5.955,34.674 ; 5.955,33.15 5.955,34.674 ; 5.955,34.674 ccw(c5.95,34.675) 5.955,34.675 ; 5.955,34.674 ccw(c5.95,34.675) 5.955,34.675 ; 5.955,34.674 ccw(c5.95,34.675) 5.955,34.675 ; 5.955,43.625 5.955,45.15 ; 5.955,43.625 5.955,45.15 ; 5.955,43.625 5.955,45.15 ; 5.955,45.15 cw(c6.25,45.15) 6.25,45.445 ; 5.955,45.15 ccw(c5.95,45.15) 5.955,45.15 ; 5.955,45.15 cw(c6.25,45.15) 6.25,45.445 ; 5.955,45.15 ccw(c5.95,45.15) 5.955,45.15 ; 5.955,45.15 cw(c6.25,45.15) 6.25,45.445 ; 5.955,45.15 ccw(c5.95,45.15) 5.955,45.15 ; 6.25,45.445 cw(c6.25,45.15) 6.25,45.445 ; 6.25,45.445 cw(c6.25,45.15) 6.25,45.445 ; 6.25,45.445 cw(c6.25,45.15) 6.25,45.445 ; 6.25,32.845 ccw(c6.25,32.85) 6.255,32.85 ; 6.25,32.845 ccw(c6.25,32.85) 6.255,32.85 ; 6.25,32.845 ccw(c6.25,32.85) 6.255,32.85 ; 6.25,32.855 cw(c6.25,32.85) 6.255,32.85 ; 6.25,32.855 cw(c6.25,32.85) 6.255,32.85 ; 6.25,32.855 cw(c6.25,32.85) 6.255,32.85 ; 6.25,45.445 7.5,45.445 ; 6.25,45.445 6.25,45.445 ; 6.25,45.445 7.5,45.445 ; 6.25,45.445 6.25,45.445 ; 6.25,45.445 7.5,45.445 ; 6.25,45.445 6.25,45.445 ; 6.251,45.455 ccw(c6.25,45.45) 6.25,45.455 ; 6.251,45.455 ccw(c6.25,45.45) 6.25,45.455 ; 6.251,45.455 ccw(c6.25,45.45) 6.25,45.455 ; 6.25,45.455 6.251,45.455 ; 6.25,45.455 6.25,45.455 ; 6.25,45.455 7.495,45.455 ; 6.25,45.455 6.251,45.455 ; 6.25,45.455 6.25,45.455 ; 6.25,45.455 7.495,45.455 ; 6.25,45.455 6.251,45.455 ; 6.25,45.455 6.25,45.455 ; 6.25,45.455 7.495,45.455 ; 6.269,32.845 cw(c6.269,32.85) 6.269,32.855 ; 6.269,32.845 cw(c6.269,32.85) 6.269,32.855 ; 6.269,32.845 cw(c6.269,32.85) 6.269,32.855 ; 6.269,32.845 7.495,32.845 ; 6.269,32.845 7.495,32.845 ; 6.269,32.845 7.495,32.845 ; 6.269,32.855 7.5,32.855 ; 6.269,32.855 7.5,32.855 ; 6.269,32.855 7.5,32.855 ; 6.969,7.71 ccw(c6.97,7.715) 6.97,7.71 ; 6.969,7.71 cw(c6.97,8.215) 6.969,8.72 ; 6.969,7.71 ccw(c6.97,7.715) 6.97,7.71 ; 6.969,7.71 cw(c6.97,8.215) 6.969,8.72 ; 6.969,7.71 ccw(c6.97,7.715) 6.97,7.71 ; 6.969,7.71 cw(c6.97,8.215) 6.969,8.72 ; 6.969,7.72 cw(c6.97,8.215) 6.97,8.71 ; 6.969,7.72 ccw(c6.97,8.215) 6.97,7.72 ; 6.969,7.72 cw(c6.97,7.715) 6.97,7.72 ; 6.969,7.72 cw(c6.97,8.215) 6.97,8.71 ; 6.969,7.72 ccw(c6.97,8.215) 6.97,7.72 ; 6.969,7.72 cw(c6.97,7.715) 6.97,7.72 ; 6.969,7.72 cw(c6.97,8.215) 6.97,8.71 ; 6.969,7.72 ccw(c6.97,8.215) 6.97,7.72 ; 6.969,7.72 cw(c6.97,7.715) 6.97,7.72 ; 6.969,7.72 6.97,7.72 ; 6.969,7.72 6.97,7.72 ; 6.969,7.72 6.97,7.72 ; 6.969,8.72 cw(c6.97,8.215) 6.97,8.72 ; 6.969,8.72 cw(c6.97,8.715) 6.97,8.72 ; 6.969,8.72 cw(c6.97,8.215) 6.97,8.72 ; 6.969,8.72 cw(c6.97,8.715) 6.97,8.72 ; 6.969,8.72 cw(c6.97,8.215) 6.97,8.72 ; 6.969,8.72 cw(c6.97,8.715) 6.97,8.72 ; 6.969,8.72 6.97,8.72 ; 6.969,8.72 6.97,8.72 ; 6.969,8.72 6.97,8.72 ; 6.97,7.71 7.495,7.71 ; 6.97,7.71 7.495,7.71 ; 6.97,7.71 7.495,7.71 ; 6.97,7.715 cw(c6.97,8.215) 6.97,8.715 7.5,8.715 7.5,29.215 ; 6.97,7.715 7.5,7.715 ; 6.97,7.715 7.5,7.715 ; 6.97,7.72 7.5,7.72 ; 6.97,7.72 7.5,7.72 ; 6.97,7.72 7.5,7.72 ; 6.97,8.71 ccw(c6.97,8.715) 6.971,8.71 ; 6.97,8.71 ccw(c6.97,8.715) 6.971,8.71 ; 6.97,8.71 ccw(c6.97,8.715) 6.971,8.71 ; 6.971,8.71 7.5,8.71 ; 6.971,8.71 7.5,8.71 ; 6.971,8.71 7.5,8.71 ; 6.97,8.72 7.495,8.72 ; 6.97,8.72 7.495,8.72 ; 6.97,8.72 7.495,8.72 ; 7.07,29.21 ccw(c7.07,29.715) 7.07,29.21 ; 7.07,29.21 cw(c7.07,29.715) 7.07,30.22 ; 7.07,29.21 ccw(c7.07,29.715) 7.07,29.21 ; 7.07,29.21 cw(c7.07,29.715) 7.07,30.22 ; 7.07,29.21 ccw(c7.07,29.715) 7.07,29.21 ; 7.07,29.21 cw(c7.07,29.715) 7.07,30.22 ; 7.07,29.21 7.495,29.21 ; 7.07,29.21 7.07,29.21 ; 7.07,29.21 7.495,29.21 ; 7.07,29.21 7.07,29.21 ; 7.07,29.21 7.495,29.21 ; 7.07,29.21 7.07,29.21 ; 7.07,29.215 7.5,29.215 ; 7.07,29.215 7.5,29.215 ; 7.07,29.22 cw(c7.07,29.715) 7.07,30.21 ; 7.07,29.22 cw(c7.07,29.715) 7.07,30.21 ; 7.07,29.22 cw(c7.07,29.715) 7.07,30.21 ; 7.07,29.22 7.07,29.22 ; 7.07,29.22 7.5,29.22 ; 7.07,29.22 7.07,29.22 ; 7.07,29.22 7.5,29.22 ; 7.07,29.22 7.07,29.22 ; 7.07,29.22 7.5,29.22 ; 7.07,30.21 ccw(c7.07,29.715) 7.07,30.21 ; 7.07,30.21 ccw(c7.07,29.715) 7.07,30.21 ; 7.07,30.21 ccw(c7.07,29.715) 7.07,30.21 ; 7.07,30.21 7.5,30.21 ; 7.07,30.21 7.07,30.21 ; 7.07,30.21 7.5,30.21 ; 7.07,30.21 7.07,30.21 ; 7.07,30.21 7.5,30.21 ; 7.07,30.21 7.07,30.21 ; 7.07,30.22 ccw(c7.07,30.215) 7.07,30.22 ; 7.07,30.22 ccw(c7.07,30.215) 7.07,30.22 ; 7.07,30.22 ccw(c7.07,30.215) 7.07,30.22 ; 7.07,30.22 7.07,30.22 ; 7.07,30.22 7.07,30.22 ; 7.07,30.22 7.495,30.22 ; 7.07,30.22 7.07,30.22 ; 7.07,30.22 7.07,30.22 ; 7.07,30.22 7.495,30.22 ; 7.07,30.22 7.07,30.22 ; 7.07,30.22 7.07,30.22 ; 7.07,30.22 7.495,30.22 ; 7.495,0.005 7.495,7.71 ; 7.495,0.005 7.495,7.71 ; 7.495,0.005 7.495,7.71 ; 7.495,8.72 7.495,29.21 ; 7.495,8.72 7.495,29.21 ; 7.495,8.72 7.495,29.21 ; 7.495,30.22 7.495,32.845 ; 7.495,30.22 7.495,32.845 ; 7.495,30.22 7.495,32.845 ; 7.495,45.455 7.495,47.095 ; 7.495,45.455 7.495,47.095 ; 7.495,45.455 7.495,47.095 ; 7.5,-0.005 ccw(c7.5,0) 7.505,0 ; 7.5,-0.005 ccw(c7.5,0) 7.505,0 ; 7.5,-0.005 ccw(c7.5,0) 7.505,0 ; 7.5,0 7.5,7.715 ; 7.5,7.72 cw(c7.5,7.715) 7.505,7.715 ; 7.5,7.72 cw(c7.5,7.715) 7.505,7.715 ; 7.5,7.72 cw(c7.5,7.715) 7.505,7.715 ; 7.5,8.71 ccw(c7.5,8.715) 7.505,8.715 ; 7.5,8.71 ccw(c7.5,8.715) 7.505,8.715 ; 7.5,8.71 ccw(c7.5,8.715) 7.505,8.715 ; 7.5,29.22 cw(c7.5,29.215) 7.505,29.215 ; 7.5,29.22 cw(c7.5,29.215) 7.505,29.215 ; 7.5,29.22 cw(c7.5,29.215) 7.505,29.215 ; 7.5,30.21 ccw(c7.5,30.215) 7.505,30.215 ; 7.5,30.21 ccw(c7.5,30.215) 7.505,30.215 ; 7.5,30.21 ccw(c7.5,30.215) 7.505,30.215 ; 7.5,32.855 cw(c7.5,32.85) 7.505,32.85 ; 7.5,32.855 cw(c7.5,32.85) 7.505,32.85 ; 7.5,32.855 cw(c7.5,32.85) 7.505,32.85 ; 7.5,45.445 ccw(c7.5,45.45) 7.505,45.45 ; 7.5,45.445 ccw(c7.5,45.45) 7.505,45.45 ; 7.5,45.445 ccw(c7.5,45.45) 7.505,45.45 ; 7.5,47.105 cw(c7.5,47.1) 7.505,47.1 ; 7.5,47.105 cw(c7.5,47.1) 7.505,47.1 ; 7.5,47.105 cw(c7.5,47.1) 7.505,47.1 ; 7.505,0 7.505,7.715 ; 7.505,0 7.505,7.715 ; 7.505,0 7.505,7.715 ; 7.505,7.715 ccw(c7.5,7.715) 7.505,7.715 ; 7.505,7.715 ccw(c7.5,7.715) 7.505,7.715 ; 7.505,7.715 ccw(c7.5,7.715) 7.505,7.715 ; 7.505,7.715 7.505,7.715 ; 7.505,7.715 7.505,7.715 ; 7.505,7.715 7.505,7.715 ; 7.505,8.715 7.505,29.215 ; 7.505,8.715 7.505,29.215 ; 7.505,8.715 7.505,29.215 ; 7.505,30.215 7.505,32.85 ; 7.505,30.215 7.505,32.85 ; 7.505,30.215 7.505,32.85 ; 7.505,45.45 7.505,47.1 ; 7.505,45.45 7.505,47.1 ; 7.505,45.45 7.505,47.1

## Other copper
Top:
  pour cut-out: 0,1.4 3,1.4 3,9.4 0,9.4
  region net BAT+: 2.809,13.797 1.763,13.802 1.674,13.713 1.486,13.713 1.407,13.792 1.407,13.998 1.455,14.046 1.763,14.046 1.811,13.998 2.789,13.998 2.824,13.962 2.824,13.843
  region net VBUS: 2.845,13.264 2.799,13.31 2.123,13.31 1.938,13.124 1.773,13.056 1.077,13.056 0.963,12.941 0.963,12.705 1.036,12.631 1.636,12.631 1.805,12.801 2.071,12.911 2.69,12.911 2.845,13.066
INNER LAYER2:
  pour cut-out: -0.026,1.412 2.236,1.412 2.236,7.497 -0.026,7.497
Bottom:
  pour cut-out: 0,1.4 3,1.4 3,9.4 0,9.4

## Silkscreen, mask and mechanical layers (free items; w line width, h text height)
Silkscreen Top:
  text "FR4  6LAYER" at 19.655,16 h1.27
  text "TOP" at 22.408,12.917 h1.27
  text "INNER LAYER2" at 22.408,9.869 h1.27
  text "INNER LAYER3" at 22.408,6.821 h1.27
  text "BOTTOM" at 22.55,3.993 h1.27
  text "Thickness：0.8mm (The tolerance：+0.05mm, -0.05mm)" at 17.102,-1.346 h2.54
Assembly Drawing Top:
  drawing of 7143 lines, arcs and shapes, not listed
  text "ic" at 3.512,14.953 h0.4
Assembly Drawing Bottom:
  drawing of 26272 lines, arcs and shapes, not listed